# Altium PCB 加速度传感器.PcbDoc
Units mm, origin at the board's own origin, x right, y up, seen from the top; angles counter-clockwise.
Board outline 152.4 x 101.6 mm, 2 copper layers (Top Layer, Bottom Layer); 11 components, 11 nets, 42 pads, 2 vias.
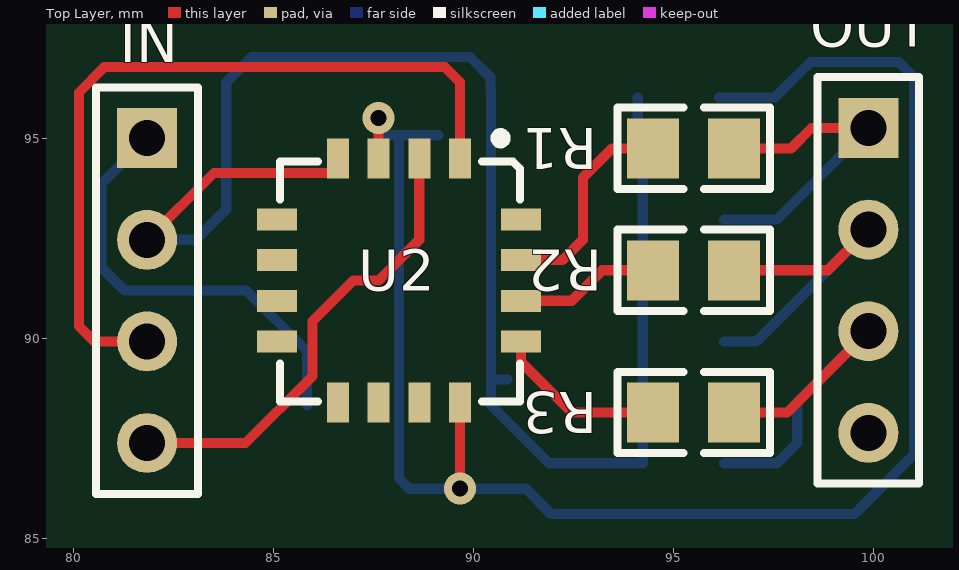
[diagram p0: Top Layer view]
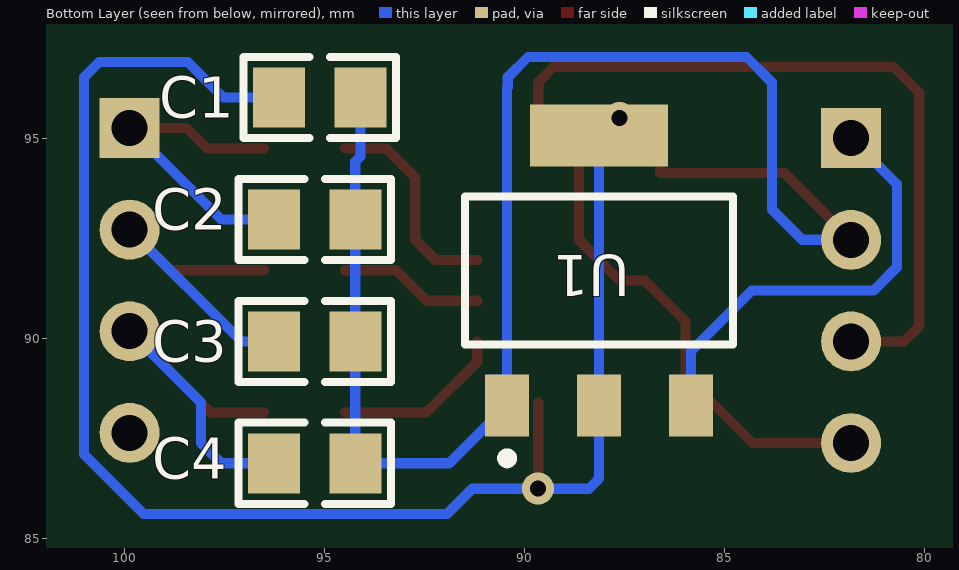
[diagram p1: Bottom Layer view, seen from below]

## Layer stack, top to bottom
Top Layer: signal copper 0.0356
Dielectric: dielectric 0.32, FR-4, Dk 4.8
Bottom Layer: signal copper 0.0356

## Board outline
25.4,25.4 177.8,25.4 177.8,127 25.4,127

## Design rules (kind name [scope] priority, off if disabled: settings)
Clearance [All] p1: gap=0.254
ComponentClearance [All] p1: gap=0.254 collisioncheckmode=3 verticalgap=0.254
PolygonConnect [All] p1: connectstyle=Relief reliefconductorwidth=0.254 reliefentries=4 polygonreliefangle="90 Angle"
RoomDefinition 加速度传感器 [InComponentClass('加速度传感器')] p1: confinementstyle=ConfineIn formatcopy=TRUE lockcomponents=FALSE outline 0,0 50.8,0 50.8,25.4 0,25.4
RoutingVias [All] p1: holewidth=0.711 width=1.27 viastyle="Through Hole" minholewidth=0.711 minwidth=1.27 maxholewidth=0.711 maxwidth=1.27
SolderMaskExpansion [All] p1: expansion=0.102
TestPointUsage [All] p1: valid=0 allowmultiple=FALSE
Testpoint [All] p1: side=15 testpointundercomponent=TRUE minsize=1.016 maxsize=2.54 preferedsize=1.524 minholesize=0 maxholesize=1.016 preferedholesize=0.813 testpointgrid=0.025 style=1023 order=0123456789
Width [All] p1: maxlimit=0.254 minlimit=0.254 preferedwidth=0.254
17 further rules are at their usual default settings.

## Components (designator, comment, footprint, x,y, rotation, side; value= is the part's Value field where it differs from the comment)
C1 "CPDR" TP-0805-R 97.663,97.282 r0 bottom
C2 "CPDR" TP-0805-R 97.79,94.234 r0 bottom
C3 "CPDR" TP-0805-R 97.79,91.186 r0 bottom
C4 "CPDR" TP-0805-R 97.79,88.138 r0 bottom
IN "PZ_4" HDR-4 80.518,88.646 r270 top
OUT "PZ_4" HDR-4 98.552,88.9 r270 top
R1 "Res" TP-0805-R 98.044,93.472 r0 top
R2 "Res" TP-0805-R 98.044,90.424 r0 top
R3 "Res" TP-0805-R 98.044,86.868 r0 top
U1 "REG1117-3.3" ZZ311 88.138,91.694 r180 bottom
U2 "MMA7260" A7260 89.662,94.234 r270 top

## Footprints (in the part's own frame and the unit in brackets; to place one, negate y for a bottom-side part, rotate by r counter-clockwise, add the part's x,y. Pads: shape width x height; smd on the part's side, far side on the other; paste and mask are expansions set on the pad)
A7260 [mm] "加速度传感器"
  rect 1x0.55 smd: 1(-0.254,0) 2(-0.254,-1.016) 3(-0.254,-2.032) 4(-0.254,-3.048) 9(5.842,-3.048) 10(5.842,-2.032) 11(5.842,-1.016) 12(5.842,0)
  rect 0.55x1 smd: 5(1.27,-4.572) 6(2.286,-4.572) 7(3.302,-4.572) 8(4.318,-4.572) 13(4.318,1.524) 14(3.302,1.524) 15(2.286,1.524) 16(1.27,1.524)
  silkscreen extent -0.89,-4.5 5.82,1.5
HDR-4 [mm] "4排针"
  rect 1.5x1.5 hole 0.9: 1(-6.35,1.322)
  round 1.5 hole 0.9: 2(-3.81,1.322) 3(-1.27,1.322) 4(1.27,1.322)
  silkscreen extent -7.62,0.05 2.54,2.59
TP-0805-R [mm] "贴片0805"
  rect 1.3x1.5 smd: 1(-3.556,1.27) 2(-1.524,1.27)
  silkscreen extent -4.44,0.25 -0.63,2.29
ZZ311 [mm] "SOT-223/SC-73; 4 Leads; Body 6.7 x 7.3 mm, inc. leads (LxW max)"
  rect 1.1x1.55 smd: 1(-2.3,-3.375) 2(0,-3.375) 3(2.3,-3.375)
  rect 3.45x1.55 smd: 4(0,3.375)
  silkscreen extent -3.35,-4.82 3.35,1.85

## Part data
C1 C2 C3 C4: "瓷片电容"
IN: "排针——4"
OUT: library part PZ_3, "排针——3"
R1 R2 R3: "电阻"
U1: library part REG1117-5, "800mA and 1A Low Dropout Positive Regulator 2.85V, 3.3V, 5V, and Adjustable"

## Via types
v1: diameter 0.8, hole 0.4, Top Layer to Bottom Layer, 2 vias

## Nets (pads, with @x,y where several pads share a name; then routed paths per layer and width w, separated by ;. In a path a pad name is that pad's centre, name@x,y a point inside that pad or via, vN(x,y) a via of type N, cw(c..) or ccw(c..) an arc to the next point about the centre after c; other vN are vias at no path point)
GND: C1.1 C2.1 C3.1 C4.1 IN.2 U1.1 U2.4 | length 40.6
  Top Layer w0.254: IN.2 83.512,94.128 86.614,94.128 U2.4
  Bottom Layer w0.254: IN.2 83.058,92.456 83.82,93.218 83.82,96.393 84.455,97.028 89.916,97.028 90.424,96.52 90.424,96.266 90.438,96.252 U1.1 91.889,86.868 C4.1 C3.1 C2.1 94.234,94.412 94.107,94.539 C1.1 ; U1.1@90.438,88.967 U1.1@90.852,88.967
NetC2_2: C2.2 OUT.1 R1.2 | length 8.1
  Top Layer w0.254: R1.2 97.942,94.742 98.45,95.25 OUT.1
  Bottom Layer w0.254: C2.2 97.588,92.964 OUT.1
NetC3_2: C3.2 OUT.2 R2.2 | length 8.5
  Top Layer w0.254: R2.2 98.858,91.694 OUT.2
  Bottom Layer w0.254: C3.2 97.08,89.916 OUT.2
NetC4_2: C4.2 OUT.3 R3.2 | length 9.8
  Top Layer w0.254: R3.2 97.842,88.138 OUT.3
  Bottom Layer w0.254: C4.2 97.587,86.868 98.095,87.376 98.095,88.391 OUT.3
NetIN_1: IN.1 U1.3 | length 11.1
  Bottom Layer w0.254: IN.1 80.696,93.852 80.696,91.77 81.28,91.186 84.328,91.186 85.838,89.676 U1.3
NetIN_3: IN.3 U2.1 | length 19.6
  Top Layer w0.254: IN.3 80.518,89.916 80.137,90.297 80.137,96.139 80.772,96.774 89.281,96.774 89.662,96.393 U2.1
NetIN_4: IN.4 U2.2 | length 11.7
  Top Layer w0.254: IN.4 84.303,87.376 85.979,89.052 85.979,90.424 86.995,91.44 87.63,91.44 88.646,92.456 U2.2
NetR1_1: R1.1 U2.15 | length 5.4
  Top Layer w0.254: U2.15 92.227,91.948 92.735,92.456 92.735,94.005 93.472,94.742 R1.1
NetR2_1: R2.1 U2.14 | length 3.6
  Top Layer w0.254: U2.14 92.456,90.932 93.218,91.694 R2.1
NetR3_1: R3.1 U2.13 | length 4.3
  Top Layer w0.254: U2.13 91.186,89.408 92.456,88.138 R3.1
VCC: C1.2 U1.2 U1.4 U2.3 U2.12 | length 41.8
  Top Layer w0.254: U2.3 v1(87.63,95.504) ; v1(89.662,86.233) U2.12
  Bottom Layer w0.254: U1.4@87.782,95.069 U1.4 ; U1.4@89.129,95.069 U1.4 ; C1.2 97.536,96.012 98.425,96.901 100.635,96.901 101.016,96.52 101.016,87.097 99.517,85.598 91.948,85.598 91.313,86.233 88.392,86.233 88.138,86.487 U1.2 U1.4
pads on no net: OUT.4 U2.5 U2.6 U2.7 U2.8 U2.9 U2.10 U2.11 U2.16